# Altium PCB MB1710051255.PcbDoc (part 2 of 4)
Units mm, origin at the board's own origin, x right, y up, seen from the top; angles counter-clockwise.
Board outline 209.55 x 153.67 mm, 2 copper layers (Top Layer, Bottom Layer); 288 components, 212 nets, 1030 pads, 414 vias.
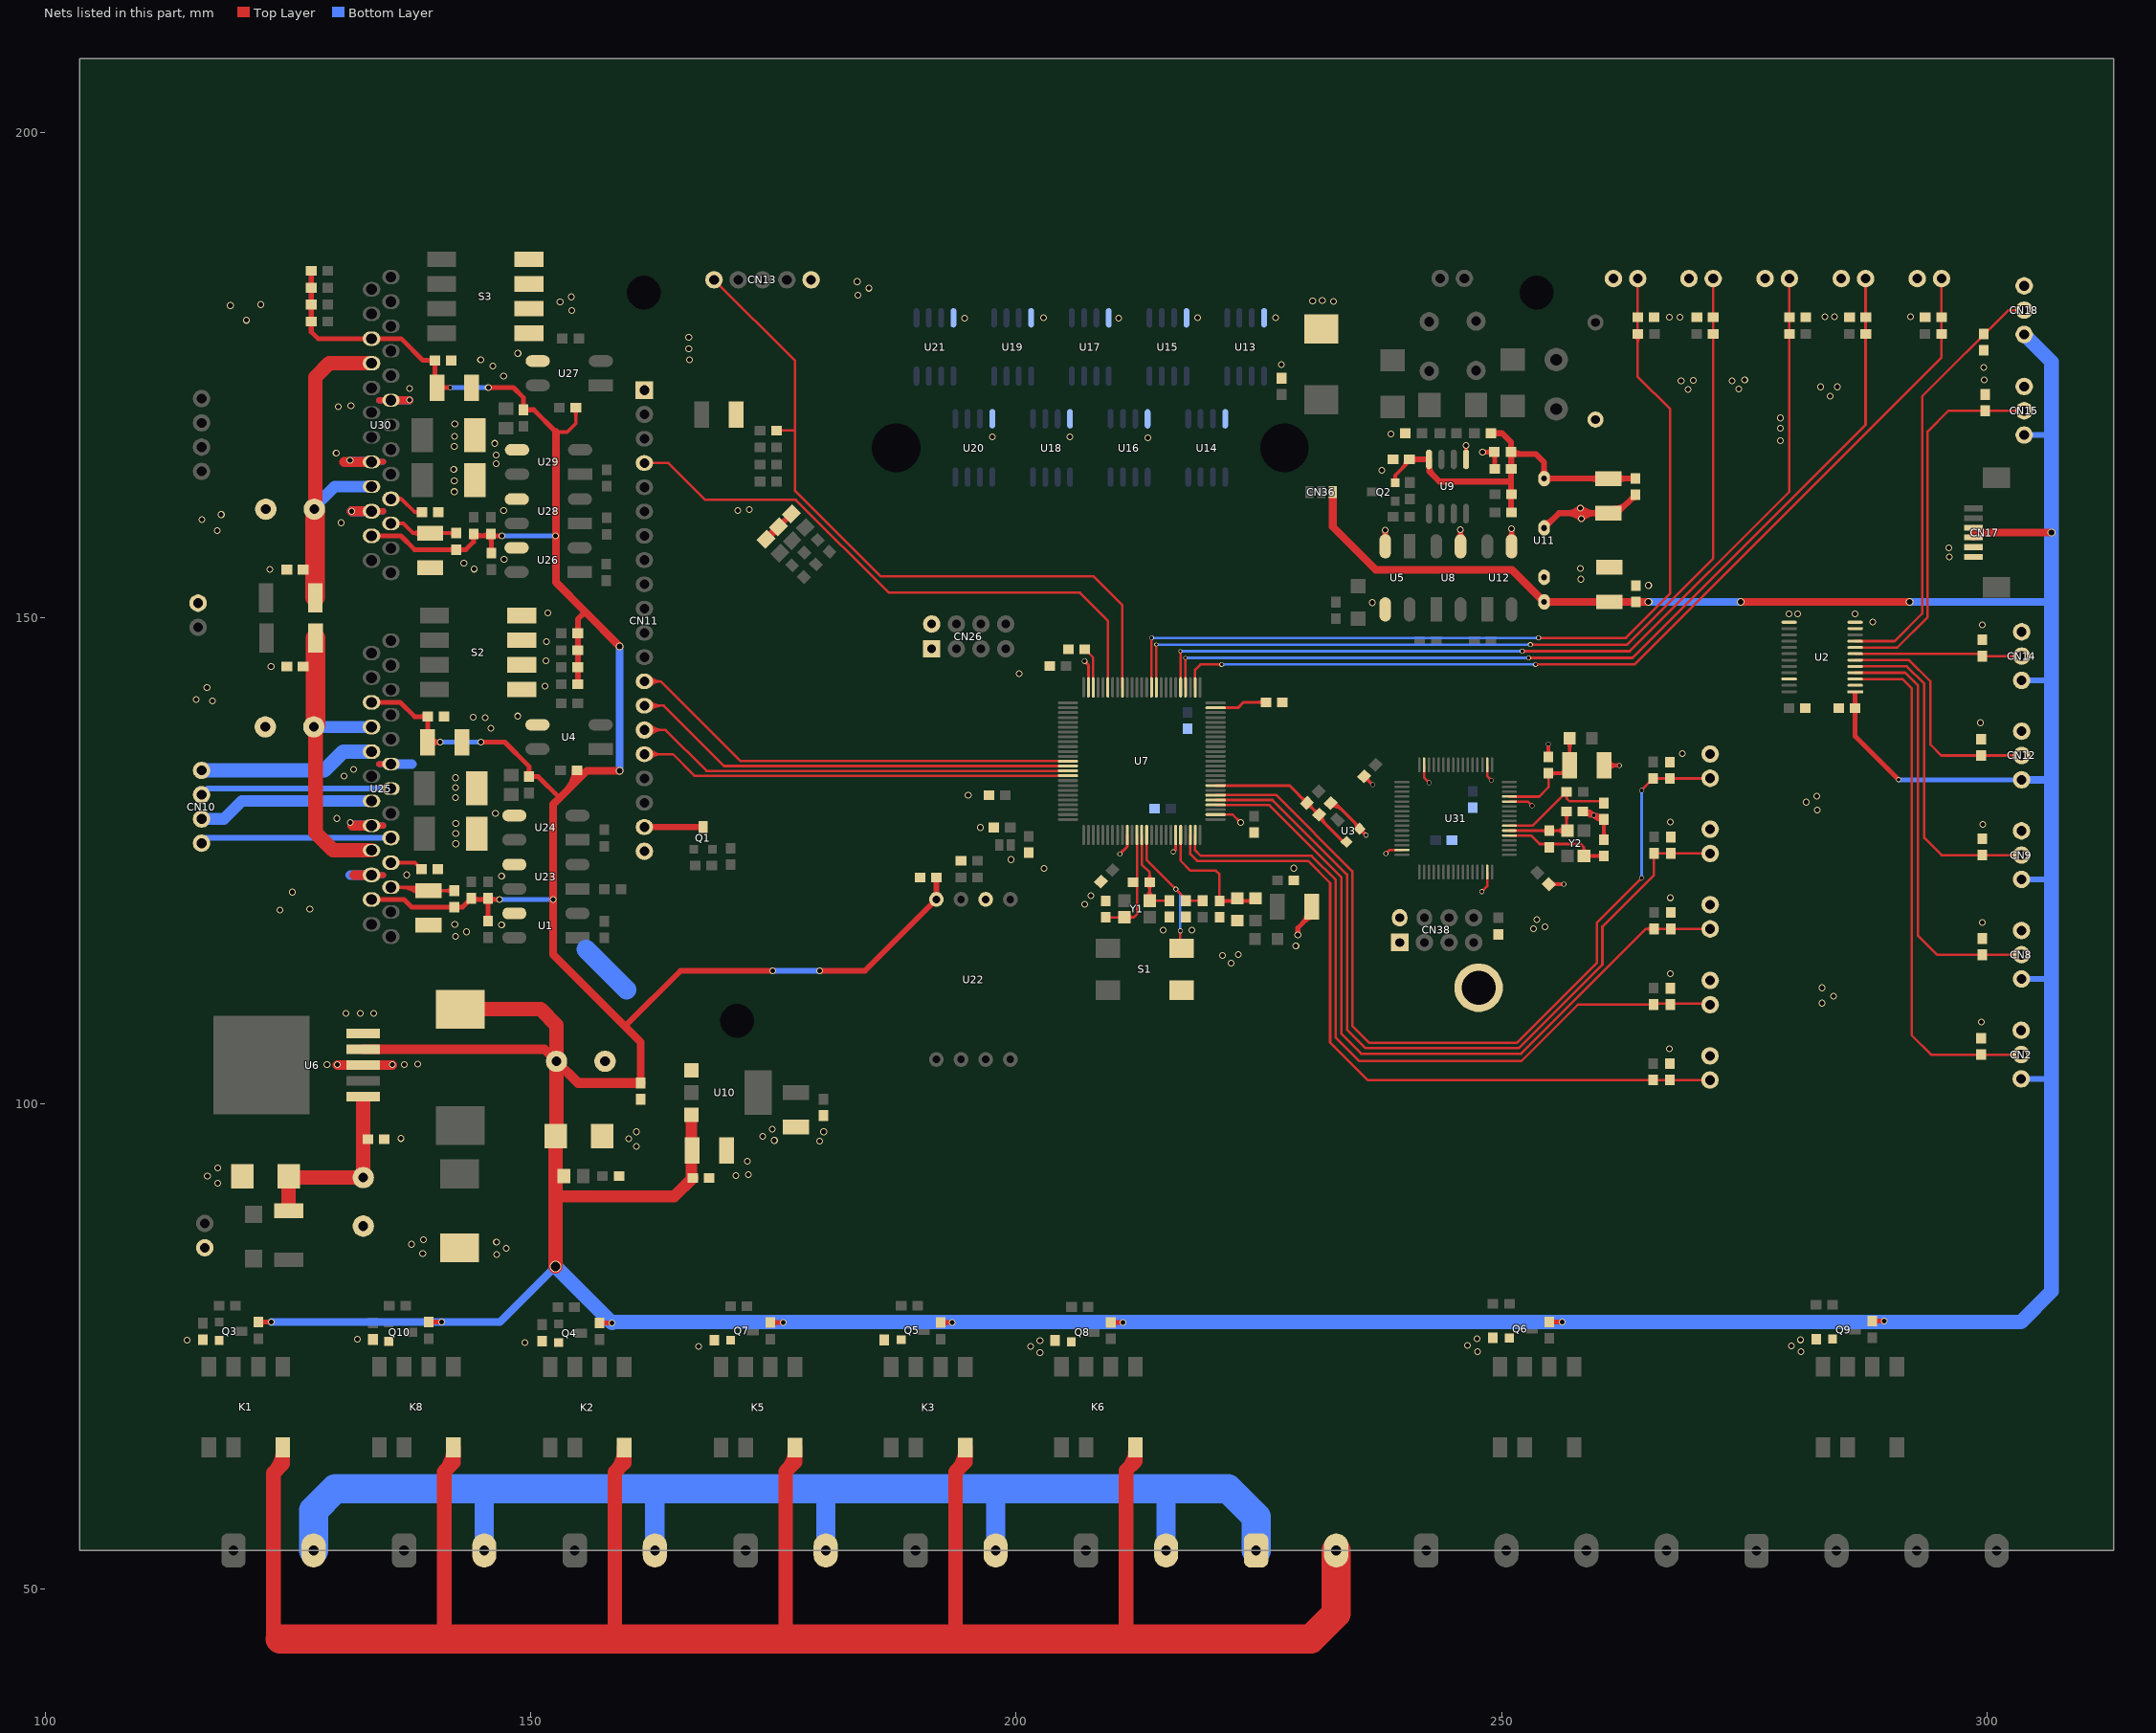
[diagram p2: the nets of this part, all layers, seen from the top]

## Via types
v1: diameter 0.7, hole 0.5, Top Layer to Bottom Layer, 231 vias
v2: diameter 0.5, hole 0.38, Top Layer to Bottom Layer, 67 vias
v3: diameter 0.5, hole 0.35, Top Layer to Bottom Layer, 64 vias
v4: diameter 0.42, hole 0.3, Top Layer to Bottom Layer, 27 vias
v5: diameter 0.45, hole 0.32, Top Layer to Bottom Layer, 8 vias
v6: diameter 0.8, hole 0.6, Top Layer to Bottom Layer, 8 vias
v7: diameter 1, hole 0.8, Top Layer to Bottom Layer, 4 vias
v8: diameter 0.45, hole 0.35, Top Layer to Bottom Layer, 3 vias
v9: diameter 1.2, hole 1, Top Layer to Bottom Layer, 1 vias
v10: diameter 0.6, hole 0.45, Top Layer to Bottom Layer, 1 vias

## Nets (pads, with @x,y where several pads share a name; then routed paths per layer and width w, separated by ;. In a path a pad name is that pad's centre, name@x,y a point inside that pad or via, vN(x,y) a via of type N, cw(c..) or ccw(c..) an arc to the next point about the centre after c; other vN are vias at no path point) (continued)
+5V: C9.1 C11.1 C14.2 C23.1 C36.2 C37.1 C39.1 C41.1 C42.1 C46.2 C64.1 C71.1 CN2.3 CN8.3 CN9.3 CN12.3 CN14.3 CN15.3 CN17.3 CN17.4 CN18.3 CN36.3 D5.2 DS4.1 L1.2 R7.1 R8.2 R10.2 R11.2 R13.1 R24.2 R28.1 R34.1 R35.1 R36.1 R38.1 R53.1 R54.1 R55.1 R56.1 R66.1 R67.1 R68.1 R69.1 R83.2 R85.2 R86.2 R88.1 R90.2 R93.1 R94.1 R95.1 R96.1 U2.1 U6.4 U10.3 U11.1 U22.1 U25.4 U25.20 U30.4 U30.20 | length 800.9
  Top Layer w0.38: 152.578,169.164 153.746,169.164 154.633,170.051 R85.2@154.633,171.679 ; R85.2@154.414,171.459 cw(c153.885,170.93) 154.633,170.93 cw(c155.382,170.93) R85.2@154.853,171.459
  Top Layer w0.5: R53.1@121.92,77.473 v1(123.266,77.473) ; R53.1@122.097,77.296 cw(c122.524,76.87) 122.524,77.473 cw(c122.524,78.077) R53.1@122.097,77.65 ; R93.1@127.204,180.366 cw(c126.777,179.94) 127.381,179.94 cw(c127.985,179.94) R93.1@127.558,180.366 ; R93.1@127.204,180.72 ccw(c126.777,181.147) 127.381,181.147 ccw(c127.985,181.147) R93.1@127.558,180.72 ; R94.1@127.204,182.119 cw(c126.777,181.692) 127.381,181.692 cw(c127.985,181.692) R94.1@127.558,182.119 ; R94.1@127.204,182.473 ccw(c126.777,182.899) 127.381,182.899 ccw(c127.985,182.899) R94.1@127.558,182.473 ; R95.1@127.204,183.846 cw(c126.777,183.419) 127.381,183.419 cw(c127.985,183.419) R95.1@127.558,183.846 ; R95.1@127.204,184.2 ccw(c126.777,184.627) 127.381,184.627 ccw(c127.985,184.627) R95.1@127.558,184.2 ; R96.1@127.204,185.573 cw(c126.777,185.147) 127.381,185.147 cw(c127.985,185.147) R96.1@127.558,185.573 ; R96.1@127.381,185.75 R95.1@127.381,184.023 R94.1@127.381,182.296 R93.1@127.381,180.543 127.381,179.476 128.075,178.782 U30.20@133.592,178.782 136.635,178.782 138.887,176.53 C9.1@140.132,176.53 140.132,173.939 C11.1@140.335,173.736 v2(141.707,173.736) ; U25.4@133.592,120.997 136.94,120.997 137.717,120.22 R11.2@142.113,120.22 142.951,120.22 R24.2@143.866,121.134 143.994,121.006 R13.1@145.593,121.006 ; U25.20@133.592,141.317 136.559,141.317 138.024,139.852 C71.1@139.37,139.852 C23.1@139.37,137.211 v1(140.665,137.211) ; U30.4@133.592,158.462 136.61,158.462 138.022,157.05 R86.2@142.316,157.05 143.309,157.05 144.094,157.836 R90.2@144.094,158.676 ; C71.1@139.143,139.676 ccw(c138.716,139.249) 138.716,139.852 ccw(c138.716,140.456) C71.1@139.143,140.029 ; C71.1@139.193,139.676 cw(c138.766,139.249) 139.37,139.249 cw(c139.973,139.249) C71.1@139.547,139.676 ; R69.1@139.471,77.473 v1(140.792,77.473) ; R69.1@139.648,77.296 cw(c140.075,76.87) 140.075,77.473 cw(c140.075,78.077) R69.1@139.648,77.65 ; C23.1@139.732,136.849 cw(c140.606,135.975) 140.606,137.211 cw(c140.606,138.447) C23.1@139.732,137.573 ; C9.1@139.905,176.353 ccw(c139.478,175.926) 139.478,176.53 ccw(c139.478,177.134) C9.1@139.905,176.707 ; C9.1@139.955,176.353 cw(c139.528,175.926) 140.132,175.926 cw(c140.735,175.926) C9.1@140.309,176.353 ; R11.2@141.936,120.043 ccw(c141.509,119.616) 141.509,120.22 ccw(c141.509,120.824) R11.2@141.936,120.397 ; R86.2@142.139,156.873 ccw(c141.713,156.446) 141.713,157.05 ccw(c141.713,157.654) R86.2@142.139,157.227 ; R11.2@142.29,120.043 cw(c142.717,119.616) 142.717,120.22 cw(c142.717,120.824) R11.2@142.29,120.397 ; R86.2@142.493,156.873 cw(c142.92,156.446) 142.92,157.05 cw(c142.92,157.654) R86.2@142.493,157.227 ; R90.2@143.917,158.449 cw(c143.491,158.022) 144.094,158.022 cw(c144.698,158.022) R90.2@144.271,158.449 ; R24.2@144.042,121.261 ccw(c144.659,121.878) 144.659,121.006 ; R90.2@144.094,158.752 144.401,158.445 R88.1@145.872,158.445 ; R90.2@144.271,158.802 ccw(c145.133,159.665) 145.133,158.445 ; 144.803,121.006 ccw(c144.803,121.872) R13.1@145.416,121.259 ; 144.837,158.445 ccw(c144.837,159.659) R88.1@145.695,158.801 ; v1(144.856,137.211) 147.32,137.211 149.809,134.722 R8.2@149.809,133.678 150.751,133.678 152.959,131.47 ; R7.1@145.416,119.023 ccw(c144.989,119.449) 145.593,119.449 ccw(c146.196,119.449) R7.1@145.77,119.023 ; R13.1@145.416,120.906 cw(c144.989,120.479) 145.593,120.479 cw(c146.196,120.479) R13.1@145.77,120.906 ; R7.1@145.593,118.796 R13.1@145.593,121.006 ; R13.1@145.593,121.133 R13.1@145.593,121.006 ; v1(145.618,173.736) 148.209,173.736 149.225,172.72 R83.2@149.225,171.448 150.294,171.448 152.578,169.164 ; R88.1@145.695,158.447 cw(c145.146,157.898) 145.923,157.898 ; R38.1@145.746,156.919 ccw(c145.319,157.346) 145.923,157.346 ccw(c146.527,157.346) R38.1@146.1,156.919 ; R13.1@145.77,121.259 ccw(c146.382,121.872) 146.382,121.006 ; R38.1@145.923,156.693 145.923,158.394 R88.1@145.872,158.445 ; v1(146.787,121.006) R13.1@145.593,121.006 ; v1(147.015,158.445) R88.1@145.872,158.445 ; R83.2@149.048,171.675 ccw(c148.621,172.102) 149.225,172.102 ccw(c149.829,172.102) R83.2@149.402,171.675 ; R83.2@149.402,171.271 cw(c149.829,170.845) 149.829,171.448 cw(c149.829,172.052) R83.2@149.402,171.625 ; R8.2@149.632,133.905 ccw(c149.206,134.332) 149.809,134.332 ccw(c150.413,134.332) R8.2@149.986,133.905 ; R8.2@149.986,133.502 cw(c150.413,133.075) 150.413,133.678 cw(c150.413,134.282) R8.2@149.986,133.855 ; R54.1@157.074,77.397 v1(158.369,77.397) ; R54.1@157.25,77.22 cw(c157.677,76.793) 157.677,77.397 cw(c157.677,78.001) R54.1@157.25,77.574 ; R66.1@174.676,77.422 v1(175.997,77.422) ; R66.1@174.853,77.246 cw(c175.279,76.819) 175.279,77.422 cw(c175.279,78.026) R66.1@174.853,77.599 ; R55.1@192.202,77.422 v1(193.396,77.422) ; R55.1@192.379,77.246 cw(c192.805,76.819) 192.805,77.422 cw(c192.805,78.026) R55.1@192.379,77.599 ; R67.1@209.728,77.448 v1(210.998,77.448) ; R67.1@209.905,77.271 cw(c210.331,76.844) 210.331,77.448 cw(c210.331,78.051) R67.1@209.905,77.625 ; R56.1@254.914,77.499 v1(256.235,77.499) ; R56.1@255.091,77.322 cw(c255.518,76.895) 255.518,77.499 cw(c255.518,78.102) R56.1@255.091,77.675 ; C14.2@286.234,140.539 cw(c285.807,140.112) 286.41,140.112 cw(c287.014,140.112) C14.2@286.587,140.539 ; C14.2@286.234,140.893 ccw(c285.807,141.32) 286.41,141.32 ccw(c287.014,141.32) C14.2@286.587,140.893 ; U2.1@286.41,142.316 C14.2@286.41,140.716 286.41,137.82 v3(290.881,133.35) ; R68.1@288.163,77.575 v1(289.408,77.575) ; R68.1@288.34,77.398 cw(c288.767,76.971) 288.767,77.575 cw(c288.767,78.178) R68.1@288.34,77.752
  Top Layer w0.6: R28.1@154.838,143.18 R34.1@154.838,144.932 R35.1@154.838,146.685 R36.1@154.838,148.438 154.838,149.885 155.6,150.647 ; 159.69,107.95 165.405,113.665 v1(174.93,113.665) ; v1(179.73,113.665) 184.419,113.665 U22.1@191.77,121.016 C64.1@191.77,123.266 ; U11.1@254.374,151.66 U11.1@254.378,151.663
  Top Layer w0.8: 152.578,169.164 152.578,153.67 155.6,150.647 v6(159.156,147.091) ; 153.767,132.278 ccw(c151.73,134.315) R10.2@154.61,134.315 ; R10.2@154.76,134.315 154.915,134.315 155.359,133.871 ; v6(159.144,134.277) 155.766,134.277 155.359,133.871 ; C36.2@161.315,102.108 161.315,106.324 159.69,107.95 152.298,115.341 v1(152.298,121.006) 152.298,130.81 152.959,131.47 155.359,133.871 ; CN36.3@232.6,162.966 232.6,159.398 237.033,154.965 251.069,154.965 U11.1@254.374,151.66 ; U11.1@254.378,151.663 C41.1@261.087,151.663 C42.1@263.83,151.663 v6(265.125,151.663) ; C41.1@260.243,151.407 ccw(c259.625,150.789) 259.625,151.663 ccw(c259.625,152.537) C41.1@260.243,151.919 ; C41.1@261.931,151.407 cw(c262.549,150.789) 262.549,151.663 cw(c262.549,152.537) C41.1@261.931,151.919 ; v6(274.599,151.663) v6(291.998,151.663) ; CN17.3@298.596,158.394 298.596,158.801 ; CN17.4@298.596,159.207 298.596,158.801 ; v6(306.629,158.801) 298.596,158.801
  Top Layer w1: U6.4@132.715,105.579 151.407,105.579 C37.1@152.643,104.343 154.878,102.108 C36.2@161.315,102.108
  Top Layer w1.2: 152.552,90.424 164.77,90.424 C46.2@166.675,92.329 166.573,92.329 166.548,92.354 U10.3@166.548,98.831
  Top Layer w1.5: L1.2@142.723,109.708 150.997,109.708 152.643,108.062 C37.1@152.643,104.343 152.643,96.712 D5.2@152.552,96.622 152.552,90.424 v9(152.552,83.214) ; D5.2@152.27,97.004 ccw(c151.368,97.906) 152.643,97.906
  Bottom Layer w0.5: v1(140.665,137.211) v1(144.856,137.211) ; v2(141.707,173.736) v1(145.618,173.736) ; v1(146.787,121.006) v1(152.298,121.006) ; v1(147.015,158.445) v1(152.552,158.445) ; v3(290.881,133.35) 290.888,133.343 CN12.3@303.563,133.343
  Bottom Layer w0.6: v1(174.93,113.665) v1(179.73,113.665) ; CN2.3@303.513,102.533 305.899,102.533 ; CN8.3@303.538,112.82 306.596,112.82 306.629,112.852 ; CN9.3@303.538,123.081 306.622,123.081 306.629,123.088 ; CN14.3@303.563,143.579 306.596,143.579 306.629,143.612 ; CN15.3@303.817,168.852 306.61,168.852 306.629,168.834 ; 306.603,151.663 306.629,151.689 ; 306.622,133.343 306.629,133.35
  Bottom Layer w0.8: v1(123.266,77.473) v1(140.792,77.473) 146.812,77.473 v9(152.552,83.214) ; v6(159.144,134.277) v6@159.144,147.079 ; v6(265.125,151.663) v6(274.599,151.663) ; v6(291.998,151.663) 306.603,151.663 ; CN12.3@303.563,133.343 306.622,133.343
  Bottom Layer w1.5: v9(152.552,83.214) v1(158.369,77.397) ; v1@158.369,77.499 v1(256.235,77.499) 303.479,77.499 306.629,80.648 306.629,112.852 306.629,123.088 306.629,133.35 306.629,143.612 306.629,151.689 306.629,168.834 306.629,176.404 CN18.3@303.817,179.215
+5VISO: C38.1 C43.1 C44.1 Q2.2 R43.1 R48.1 R49.1 R50.1 R52.2 U9.8 U11.6 | length 52.3
  Top Layer w0.38: Q2.2@238.85,164.133 ccw(c238.394,164.589) 239.039,164.589 ccw(c239.684,164.589) Q2.2@239.228,164.133 ; Q2.2@239.039,163.944 239.039,164.694 240.487,166.141 C38.1@240.487,166.345 ; 239.729,165.383 ccw(c238.768,166.345) C38.1@240.127,166.345
  Top Layer w0.6: C38.1@240.487,166.345 U9.8@242.519,166.345 242.519,165.125 243.586,164.059 250.977,164.059 ; U9.8@242.537,165.646 ccw(c243.836,165.646) 242.917,164.727 ; R52.2@248.893,169.037 250.038,169.037 250.964,168.111 R50.1@250.964,166.903 ; R48.1@250.811,161.025 ccw(c250.411,161.426) 250.977,161.426 ; R43.1@250.811,162.596 cw(c250.411,162.196) 250.977,162.196 ; R43.1@250.811,162.879 ccw(c250.411,163.28) 250.977,163.28 ; R50.1@250.811,167.248 ccw(c250.441,167.618) 250.964,167.618 ; R49.1@250.836,165.495 ccw(c250.466,165.865) 250.989,165.865 ; R49.1@250.977,165.354 250.977,164.059 ; R49.1@250.989,165.1 250.989,166.878 R50.1@250.964,166.903 ; 250.989,166.593 cw(c251.516,166.593) R50.1@251.143,166.965 ; R48.1@251.003,160.884 250.977,160.909 250.977,164.059 ; R50.1@251.143,167.248 ccw(c251.975,168.08) 251.975,166.903 ; U11.6@254.162,164.772 ccw(c253.65,165.284) 254.374,165.284 ccw(c255.099,165.284) U11.6@254.587,164.772 ; U11.6@254.587,164.148 cw(c255.107,163.627) 255.107,164.363 ; U11.6@254.587,164.572 ccw(c255.09,165.075) 255.09,164.363 ; C43.1@260.07,164.037 ccw(c259.282,163.248) 259.282,164.363 ccw(c259.282,165.479) C43.1@260.07,164.69 ; C43.1@261.9,164.037 cw(c262.688,163.248) 262.688,164.363 cw(c262.688,165.479) C43.1@261.9,164.69 ; C44.1@263.779,164.363 C43.1@260.985,164.363 254.378,164.363 U11.6@254.374,164.36 254.374,166.046 253.517,166.903 R50.1@250.964,166.903
GND: C1.2 C2.2 C3.1 C4.2 C5.2 C6.2 C7.2 C8.2 C9.2 C10.2 C11.2 C12.1 C13.2 C14.1 C15.1 C16.1 C17.1 C18.1 C19.2 C20.2 C21.2 C22.2 C23.2 C24.1 C25.1 C26.2 C27.1 C28.2 C29.1 C30.1 C31.1 C32.1 C33.1 C34.1 C35.2 C36.1 C37.2 C39.2 C40.1 C41.2 C42.2 C45.2 C46.1 C47.2 C48.2 C49.2 C50.1 C51.1 C52.1 C53.1 C54.1 C55.1 C56.2 C57.1 C58.2 C59.2 C60.1 C61.1 C62.2 C63.2 C64.2 C65.2 C66.1 C67.1 C68.2 C69.2 C70.2 C71.2 C72.2 C73.2 CN1.1 CN2.1 CN3.1 CN4.1 CN5.1 CN6.1 CN7.1 CN8.1 CN9.1 CN11.1 CN11.20 CN12.1 CN13.5 CN14.1 CN15.1 CN17.1 CN17.2 CN18.1 CN19.1 CN20.1 CN21.1 CN22.1 CN23.1 CN24.1 CN26.1 CN26.5 CN38.1 CN38.5 D3.1 D4.1 D5.1 DS1.2 DS2.2 DS3.2 pad.0@247.621,111.923 Q3.2 Q4.2 Q5.2 Q6.2 Q7.2 Q8.2 Q9.2 Q10.2 R26.1 R27.1 R44.1 R45.1 R61.2 R62.2 R63.2 R64.2 R74.2 R75.2 R76.2 R78.2 R80.1 R82.1 R91.1 R92.1 R97.1 S1.1 S2.1 S2.2 S2.3 S2.4 S3.1 S3.2 S3.3 S3.4 U1.3 U2.2 U2.11 U2.12 U2.13 U2.22 U3.2 U4.3 U5.3 U6.3 U6.5 U7.10 U7.20 U7.27 U7.74 U10.1 U11.2 U13.4 U14.4 U15.4 U16.4 U17.4 U18.4 U19.4 U20.4 U21.4 U22.3 U23.3 U24.3 U25.6 U25.10 U25.15 U26.3 U27.3 U28.3 U29.3 U30.6 U30.10 U30.15 U31.12 U31.18 U31.31 U31.47 U31.63 | length 128.8
  Top Layer w0.254: U7.27@220.528,129.755 222.289,129.755 v1(223.114,128.93) ; v1@222.891,128.93 ccw(c222.352,128.93) 222.733,129.311 ccw(c223.114,129.692) v1@223.114,129.153 ; v2(238.074,125.755) 238.424,126.105 U31.47@239.731,126.105 ; v2@238.074,125.878 ccw(c238.074,126.175) 238.284,125.965 ccw(c238.494,125.755) v2@238.197,125.755 ; U31.31@242.006,134.88 242.006,133.559 v2(242.545,133.02) ; v2@242.422,133.02 ccw(c242.125,133.02) 242.335,133.23 ccw(c242.545,133.44) v2@242.545,133.143 ; v2(247.955,121.818) 248.506,122.369 U31.63@248.506,123.83 ; v2@247.955,121.941 ccw(c247.955,122.238) 248.165,122.028 ccw(c248.375,121.818) v2@248.078,121.818 ; U31.18@248.506,134.88 248.506,133.714 v2(248.945,133.274) ; v2@248.822,133.274 ccw(c248.525,133.274) 248.735,133.484 ccw(c248.945,133.694) v2@248.945,133.397 ; U31.12@250.781,131.105 252.689,131.105 v2(253.136,130.658) ; v2@253.013,130.658 ccw(c252.716,130.658) 252.926,130.868 ccw(c253.136,131.078) v2@253.136,130.781
  Top Layer w0.3: v10@207.01,145.593 207.428,145.175 U7.74@207.428,142.855 ; v10@207.035,145.417 cw(c207.035,145.055) 207.291,145.311 cw(c207.548,145.567) v10@207.185,145.567 ; v2(210.668,125.705) 211.428,126.465 U7.10@211.428,127.655 ; v2(216.179,125.908) 216.428,126.157 U7.20@216.428,127.655 ; C21.2@232.381,130.944 232.847,130.944 235.365,128.426 U3.2@235.365,128.289 v2(236.017,127.638) ; C21.2@232.417,130.63 cw(c232.417,128.831) 233.688,130.103 ; C21.2@232.417,130.93 cw(c232.417,129.856) 233.176,130.615 ; 234.744,129.047 cw(c233.986,128.289) U3.2@235.058,128.289 ; 235.074,128.717 ccw(c235.365,129.008) U3.2@235.365,128.597 ; U3.2@235.365,127.982 cw(c235.365,127.241) 235.889,127.765 cw(c236.414,128.289) U3.2@235.672,128.289 ; 235.734,127.855 cw(c235.533,127.508) v2@235.92,127.612 ; 235.799,127.921 ccw(c236.146,128.121) v2@236.043,127.734 ; C66.1@235.831,133.347 cw(c235.831,132.502) 236.428,133.1 cw(c237.025,133.697) C66.1@236.181,133.697 ; C66.1@235.831,133.697 v2(236.703,132.825)
  Top Layer w0.38: C68.2@254.594,135.956 ccw(c254.064,136.485) 254.813,136.485 ccw(c255.561,136.485) C68.2@255.032,135.956 ; C68.2@254.813,135.687 v2(254.813,137.008) ; C16.1@254.847,122.597 v2(256.405,122.597) ; C16.1@255.101,122.343 cw(c255.716,121.728) 255.716,122.597 ; C16.1@255.101,122.781 ccw(c255.545,123.225) C16.1@255.545,122.597 ; C65.2@258.369,130.073 259.08,130.073 ; C65.2@258.411,130.143 cw(c258.536,129.022) v2@259.334,129.819 ; C65.2@258.453,129.765 cw(c258.648,128.016) 259.893,129.261 ; C65.2@258.657,129.875 cw(c259.08,129.523) 259.08,130.073 ; C65.2@258.657,130.272 ccw(c259.08,130.623) 259.08,130.073 ; 259.086,129.642 ccw(c259.179,130.122) v2@259.453,129.717 ; 259.247,129.952 cw(c258.983,129.588) v2@259.427,129.658 ; 259.272,129.855 cw(c259.105,129.565) v2@259.428,129.651 ; v2@259.522,129.618 cw(c259.822,129.203) 259.904,129.709 ; v2@259.544,129.683 ccw(c259.832,129.76) 259.683,129.502 ; v2@259.546,129.676 ccw(c259.97,129.738) 259.714,129.394 ; v2@259.609,129.545 ccw(c260.372,130.308) C22.2@260.539,129.241 ; C22.2@260.283,129.07 ccw(c259.893,128.765) 259.893,129.261 ; C22.2@260.283,129.451 cw(c259.893,129.756) 259.893,129.261 ; C20.2@260.309,127.447 ccw(c259.779,127.976) 260.528,127.976 ccw(c261.276,127.976) C20.2@260.747,127.447 ; C22.2@260.309,128.991 cw(c259.779,128.462) 260.528,128.462 cw(c261.276,128.462) C22.2@260.747,128.991 ; C22.2@260.48,129.617 cw(c260.229,131.222) 259.08,130.073 ; C20.2@260.528,127.178 C22.2@260.528,129.261 259.893,129.261 ; C26.2@260.553,134.823 v2(262.128,134.823) ; C26.2@260.958,134.419 cw(c261.934,133.442) 261.934,134.823 cw(c261.934,136.204) C26.2@260.958,135.228 ; 261.858,134.803 cw(c261.94,134.497) v2@262.098,134.771 ; 261.858,134.844 ccw(c261.94,135.149) v2@262.098,134.875 ; 259.08,130.073 259.893,129.261
  Top Layer w0.5: DS3.2@174.224,158.118 DS2.2@175.499,159.393 DS1.2@176.846,160.74 ; DS3.2@174.295,158.588 ccw(c174.295,159.554) 174.978,158.871 ccw(c175.661,158.188) DS3.2@174.695,158.188 ; DS3.2@174.462,158.574 ccw(c173.872,159.596) DS2.2@175.035,159.391 ; DS3.2@174.68,158.356 cw(c175.702,157.765) DS2.2@175.498,158.928 ; DS2.2@175.029,159.322 cw(c174.063,159.322) 174.746,158.639 cw(c175.429,157.956) DS2.2@175.429,158.922 ; DS2.2@175.57,159.863 ccw(c175.57,160.829) 176.253,160.146 ccw(c176.936,159.463) DS2.2@175.97,159.463 ; DS1.2@176.376,160.669 cw(c175.41,160.669) 176.093,159.986 cw(c176.776,159.303) DS1.2@176.776,160.269 ; v1(229.006,117.373) 229.006,118.085 230.454,119.532 C62.2@230.454,120.269 ; 229.475,118.553 ccw(c228.347,119.681) C62.2@229.942,119.681 ; 229.834,118.912 cw(c230.454,118.292) C62.2@230.454,119.169
  Top Layer w0.6: U25.6@133.592,123.537 134.803,123.537 134.815,123.525 ; U25.10@133.592,128.617 134.803,128.617 ; U30.6@133.592,161.002 134.803,161.002 ; U30.10@133.592,166.082 134.803,166.082 ; 134.36,134.946 134.381,134.967 U25.15@135.592,134.967 ; 134.36,172.411 134.381,172.432 U30.15@135.592,172.432
  Top Layer w0.8: U30.15@135.601,172.441 U30.15@135.592,172.432 137.507,172.432 v1(137.516,172.441)
  Top Layer w1: v1@130.082,103.954 U6.3@132.715,103.954 v1@135.704,103.954 ; 130.742,166.082 U30.10@133.592,166.082 ; v1(131.555,161.002) U30.6@133.592,161.002 ; 131.581,128.617 U25.10@133.592,128.617 ; 131.817,123.537 U25.6@133.592,123.537
  Bottom Layer w0.6: U25.6@133.592,123.537 134.803,123.537 134.815,123.525 ; U25.10@133.592,128.617 134.803,128.617 ; U30.6@133.592,161.002 134.803,161.002 134.815,160.99 ; U30.10@133.592,166.082 134.803,166.082 ; 134.36,172.411 134.381,172.432 U30.15@135.592,172.432 ; 134.381,134.967 U25.15@135.592,134.967
  Bottom Layer w0.8: U30.15@135.592,172.432 v1@137.507,172.432
  Bottom Layer w1: 131.403,123.537 U25.6@133.592,123.537 ; v1@131.403,166.082 U30.10@133.592,166.082 ; v1@131.538,161.002 U30.6@133.592,161.002 ; 131.69,128.617 U25.10@133.592,128.617 ; U25.15@135.592,134.967 137.727,134.967
  Bottom Layer w2: 155.702,115.875 159.868,111.709
  other v1: 202.438,74.324 280.822,74.425 247.523,74.451 167.284,74.959 201.498,74.984 279.857,75.035 246.482,75.06 149.403,75.365 202.438,75.568 114.579,75.619 280.797,75.644 132.131,75.695 247.447,75.771 146.482,84.455 138.862,84.531 147.447,85.065 137.693,85.496 146.456,85.725 138.938,85.954 117.754,91.796 116.688,92.532 171.12,92.558 172.415,92.685 117.729,93.37 172.314,94.056 160.884,95.58 179.73,96.114 175.082,96.19 160.096,96.368 136.627,96.393 173.888,96.622 160.858,97.079 180.162,97.079 174.854,97.358 130.048,103.988 135.738,103.988 129.007,104.013 136.982,104.013 138.354,104.038 267.284,105.639 299.39,108.382 130.962,109.271 132.436,109.296 133.807,109.296 283.007,110.338 284.175,111.049 283.007,111.912 267.36,113.386 222.123,114.452 221.259,115.24 222.885,115.341 228.803,116.23 142.24,117.196 143.383,117.678 215.113,117.856 218.084,117.856 253.289,118.008 254.457,118.212 146.99,118.389 142.164,118.44 299.491,118.643 253.619,118.923 124.155,119.939 127.229,120.015 207.035,120.498 267.386,121.183 207.696,121.387 125.425,121.768 146.99,123.419 137.211,123.546 202.87,124.206 228.6,124.231 199.466,125.12 142.265,126.746 142.265,127.813 196.291,128.422 299.542,128.753 142.265,128.829 131.394,128.93 267.36,129.007 129.997,129.362 146.355,129.896 282.499,130.226 281.381,131.039 142.24,131.496 282.448,131.648 195.047,131.75 142.24,132.537 142.24,133.553 130.759,133.706 131.724,134.417 268.605,136.042 145.872,138.659 299.314,139.217 145.313,139.725 144.043,139.802 148.641,139.903 117.221,141.453 115.519,141.605 116.637,142.824 151.46,142.977 200.304,144.272 123.241,145.009 151.536,145.593 151.613,147.574 299.491,149.301 288.214,149.606 279.603,150.419 280.467,150.444 286.41,150.444 151.74,150.546 236.652,151.587 265.125,153.365 258.166,154 123.114,155.016 144.145,155.042 258.115,155.092 143.104,155.651 147.244,156.032 296.088,156.286 296.062,157.226 117.678,159.004 130.454,159.817 116.129,160.122 118.11,160.655 147.193,161.087 171.323,161.087 172.491,161.188 142.113,163.017 142.113,164.135 142.062,165.303 146.431,165.913 131.369,166.243 146.431,166.802 129.946,167.005 142.113,167.665 146.279,167.996 278.714,168.275 213.538,168.554 197.536,168.656 205.537,168.656 142.138,168.707 278.689,169.545 142.164,169.977 278.714,170.612 130.15,171.78 131.47,171.882 283.82,172.847 269.215,173.558 274.422,173.584 137.516,173.66 282.854,173.812 284.556,173.812 268.478,174.447 273.736,174.447 269.748,174.498 275.031,174.549 299.72,174.549 147.193,174.93 299.669,175.793 146.101,175.946 227.305,176.098 166.319,176.581 144.831,176.606 148.666,177.267 166.268,177.749 166.268,178.918 120.701,180.67 194.691,180.899 210.566,180.899 202.819,180.924 218.694,180.924 226.695,180.95 267.259,181 268.351,181 283.286,181.051 284.277,181.051 292.1,181.051 154.229,181.661 119.05,182.194 122.174,182.296 153.01,182.55 232.664,182.626 230.53,182.651 231.521,182.728 154.153,183.083 183.693,183.261 184.836,183.972 183.617,184.658
  other v2: 259.486,129.667
  other v10: 207.035,145.567
ISO: C38.2 C43.2 C44.2 L2.2 R42.1 R49.2 R50.2 U5.2 U8.3 U9.5 U11.4 U12.3 | length 44.4
  Top Layer w0.38: U5.2@237.718,158.331 ccw(c237.019,159.03) 238.008,159.03 ccw(c238.998,159.03) U5.2@238.298,158.331 ; v1@237.87,158.99 cw(c237.505,158.779) 237.912,158.67 ; v1@237.895,158.957 cw(c237.622,158.684) 238.008,158.684 cw(c238.395,158.684) v1@238.122,158.957 ; 237.925,158.718 cw(c238.264,158.627) v1@238.088,158.931 ; v1@237.928,158.931 cw(c237.753,158.627) 238.092,158.718 ; U5.2@238.008,157.391 v1(238.008,159.07) ; 238.105,158.67 cw(c238.512,158.779) v1@238.147,158.99 ; U8.3@245.47,158.329 ccw(c244.77,159.029) 245.76,159.029 ccw(c246.75,159.029) U8.3@246.05,158.329 ; v1@245.606,159.026 cw(c245.17,158.774) 245.657,158.644 ; v1@245.632,158.992 cw(c245.323,158.683) 245.76,158.683 ; v1@245.665,158.967 cw(c245.481,158.648) 245.836,158.744 ; v1(245.745,159.106) 245.76,159.091 U8.3@245.76,157.389 ; 245.76,158.756 cw(c246.095,158.756) v1@245.858,158.992 ; 245.843,158.719 cw(c246.234,158.823) v1@245.884,159.026 ; v1@246.216,167.679 cw(c245.943,167.406) 246.329,167.406 cw(c246.715,167.406) v1@246.442,167.679 ; U9.5@246.329,166.345 v1(246.329,167.792) ; U12.3@250.728,158.329 ccw(c250.028,159.029) 251.018,159.029 ccw(c252.008,159.029) U12.3@251.308,158.329 ; v1@250.89,159.127 cw(c250.448,158.872) 250.941,158.741 ; v1@250.915,159.094 cw(c250.667,158.846) 251.018,158.846 ; U12.3@251.018,157.389 251.018,159.197 v1(251.028,159.207) ; 251.018,158.796 cw(c251.44,158.796) v1@251.141,159.094 ; 251.109,158.689 cw(c251.667,158.838) v1@251.167,159.127
  Top Layer w0.5: v1(248.031,167.107) R50.2@249.252,167.107 249.277,167.081 R49.2@249.277,165.354 ; R50.2@249.025,166.93 ccw(c248.598,166.503) 248.598,167.107 ccw(c248.598,167.71) R50.2@249.025,167.283 ; R49.2@249.101,165.531 ccw(c248.674,165.958) 249.277,165.958 ccw(c249.881,165.958) R49.2@249.454,165.531 ; R50.2@249.125,166.93 cw(c248.758,166.562) 249.277,166.562 ; 249.277,166.444 cw(c249.965,166.444) R50.2@249.479,166.93
  Top Layer w0.6: U11.4@254.374,159.28 255.902,160.807 C43.2@260.985,160.807 261.899,160.807 C44.2@263.779,162.687 ; U11.4@254.374,159.78 ccw(c254.374,160.987) 255.228,160.133 ; 256.706,160.807 ccw(c256.706,162.749) v1@258.079,161.376 ; 256.721,160.807 cw(c256.721,158.779) v1@258.156,160.213 ; v1@258.15,161.376 ccw(c259.523,162.749) 259.523,160.807 ; v1@258.226,160.213 cw(c259.661,158.779) C43.2@259.661,160.807 ; C43.2@260.07,160.481 ccw(c259.282,159.692) 259.282,160.807 ccw(c259.282,161.923) C43.2@260.07,161.134 ; C43.2@261.573,161.269 ccw(c261.573,163.173) 262.919,161.827 ; C44.2@263.352,162.26 cw(c263.779,161.833) C44.2@263.779,162.437
  other v1: 258.191,160.249 258.115,161.341 237.642,165.227 238.608,168.961
L: CN31.2 K1.8 K2.8 K3.8 K5.8 K6.8 K8.8 | length 252
  Top Layer w1.5: 124.181,44.834 124.155,44.809 123.495,45.469 123.495,61.928 ; K1.8@124.46,64.311 cw(c121.164,64.259) 123.495,61.928 ; K1.8@124.46,64.586 124.46,62.894 123.495,61.928 ; 141.072,44.834 141.072,62.055 142.011,62.995 K8.8@142.011,64.586 ; 141.081,62.065 ccw(c138.835,64.311) K8.8@142.011,64.311 ; 158.648,44.834 158.648,62.005 159.614,62.97 K2.8@159.614,64.561 ; 158.683,62.039 ccw(c156.437,64.286) K2.8@159.614,64.286 ; 176.251,44.834 176.251,62.106 177.216,63.071 K5.8@177.216,64.561 ; 176.357,62.213 ccw(c174.284,64.286) K5.8@177.216,64.286 ; 193.751,44.834 193.751,62.055 194.742,63.046 K3.8@194.742,64.561 ; 193.865,62.169 ccw(c191.749,64.286) K3.8@194.742,64.286 ; 211.277,44.834 211.303,44.86 211.303,62.182 212.268,63.148 K6.8@212.268,64.586 ; 211.445,62.325 ccw(c209.459,64.311) K6.8@212.268,64.311
  Top Layer w3: 124.181,44.834 141.072,44.834 158.648,44.834 176.251,44.834 193.751,44.834 211.277,44.834 230.327,44.834 232.954,47.461 CN31.2@232.954,53.953
N: CN28.2 CN29.2 CN30.2 CN31.1 CN33.2 CN34.2 CN35.2 | length 138.7
  Bottom Layer w2: CN35.2@145.197,53.953 145.197,60.211 145.288,60.303 ; CN29.2@162.773,53.953 162.773,60.288 162.789,60.303 ; CN33.2@180.376,53.953 180.376,60.211 180.467,60.303 ; 197.79,60.303 197.876,60.216 CN30.2@197.876,53.953 ; 215.417,60.303 215.428,60.293 CN34.2@215.428,53.953
  Bottom Layer w3: CN28.2@127.62,53.953 127.62,58.078 129.845,60.303 145.288,60.303 162.789,60.303 180.467,60.303 197.79,60.303 215.417,60.303 221.818,60.303 224.704,57.417 CN31.1@224.704,53.953
NetC1_1: C1.1 C10.1 F2.1 U25.8 U25.18 | length 35.1
  Top Layer w0.5: C10.1@126.238,145.009 127.787,145.009 127.813,144.983 ; C10.1@126.77,144.832 cw(c127.196,144.405) 127.196,145.009 cw(c127.196,145.612) C10.1@126.77,145.185
  Top Layer w1.5: C1.1@127.813,138.953 127.813,127.889 129.625,126.077 U25.8@133.592,126.077
  Top Layer w2: C1.1@127.813,138.953 127.813,144.983 F2.1@127.813,147.955
  Bottom Layer w1.2: C1.1@127.646,138.786 127.654,138.777 U25.18@133.592,138.777
NetC2_1: C2.1 C72.1 F3.1 U30.8 U30.18 | length 36.2
  Top Layer w1.5: C2.1@127.787,161.214 127.787,174.803 129.227,176.242 U30.18@133.592,176.242
  Top Layer w2: F3.1@127.787,152.095 C2.1@127.787,161.214
  Bottom Layer w1.2: C2.1@127.468,161.214 129.796,163.542 U30.8@133.592,163.542
NetC3_2: C3.2 CN2.2 U2.3 | length 54.1
  Top Layer w0.254: U2.3@286.41,143.718 291.283,143.718 292.227,142.773 292.227,107.036 294.23,105.033 CN2.2@303.513,105.033
NetC4_1: C4.1 CN3.2 R1.1 U7.23 | length 76.5
  Top Layer w0.254: U7.23@217.928,127.655 217.928,125.683 218.618,124.993 230.048,124.993 232.334,122.707 232.334,106.274 236.195,102.413 R1.1@265.582,102.413 ; 263.861,102.407 CN3.2@271.45,102.407
NetC5_1: C5.1 CN4.2 R2.1 U7.24 | length 75.7
  Top Layer w0.254: U7.24@218.428,127.655 218.428,126.072 218.999,125.501 230.429,125.501 232.918,123.012 232.918,106.782 235.331,104.369 252.019,104.369 257.835,110.185 R2.1@265.633,110.185 ; R2.1@265.557,110.287 271.368,110.287 CN4.2@271.475,110.18
NetC6_1: C6.1 CN5.2 R3.1 U7.29 | length 77.6
  Top Layer w0.254: U7.29@220.528,130.755 226.039,130.755 233.502,123.292 233.502,107.163 235.534,105.131 251.997,105.131 264.85,117.983 ; R3.1@265.406,117.734 ccw(c264.85,117.237) 264.85,117.983 ; R3.1@265.406,118.232 cw(c264.85,118.729) 264.85,117.983 ; CN5.2@271.475,117.978 271.47,117.983 R3.1@265.684,117.983 264.85,117.983
NetC7_1: C7.1 CN6.2 R4.1 U7.30 | length 82.8
  Top Layer w0.254: U7.30@220.528,131.255 226.377,131.255 234.061,123.571 234.061,107.62 235.996,105.685 251.768,105.685 260.375,114.292 260.375,118.212 265.684,123.52 R4.1@265.684,125.75 ; R4.1@265.684,125.755 R4.1@265.684,125.75 ; CN6.2@271.475,125.75 R4.1@265.684,125.75
NetC8_1: C8.1 CN7.2 R5.1 U7.31 | length 91.7
  Top Layer w0.254: U7.31@220.528,131.755 226.791,131.755 234.62,123.927 234.62,107.975 236.357,106.239 251.538,106.239 259.821,114.522 259.821,118.623 v2(264.414,123.215) ; v2@264.291,123.215 cw(c263.994,123.215) 264.204,123.005 cw(c264.414,122.795) v2@264.414,123.092 ; v2(264.414,132.258) 264.414,132.283 R5.1@265.608,133.477 271.455,133.477 CN7.2@271.475,133.497 ; v2@264.414,132.381 ccw(c264.414,132.616) 264.581,132.45 ; v2@264.537,132.258 cw(c264.895,132.258) 264.642,132.511
  Bottom Layer w0.254: v2@264.327,123.302 ccw(c264.117,123.512) 264.414,123.512 ccw(c264.711,123.512) v2@264.501,123.302 ; v2@264.327,132.171 cw(c264.117,131.961) 264.414,131.961 cw(c264.711,131.961) v2@264.501,132.171 ; v2(264.414,123.215) v2(264.414,132.258)
NetC12_2: C12.2 CN8.2 U2.4 | length 44.3
  Top Layer w0.254: U2.4@286.41,144.368 291.572,144.368 292.862,143.078 292.862,117.297 294.839,115.32 CN8.2@303.538,115.32
NetC15_2: C15.2 CN9.2 U2.5 | length 34.5
  Top Layer w0.254: U2.5@286.41,145.018 291.735,145.018 293.522,143.231 293.522,127.356 295.297,125.581 CN9.2@303.538,125.581
NetC18_2: C18.2 CN12.2 U2.6 | length 25
  Top Layer w0.254: U2.6@286.41,145.668 291.974,145.668 294.157,143.485 294.157,136.957 295.271,135.843 CN12.2@303.563,135.843
NetC20_1: C20.1 R98.1 U31.5 Y2.1 | length 13.4
  Top Layer w0.254: U31.5@250.781,127.605 253.014,127.605 253.898,126.721 258.14,126.721 258.47,126.39 ; Y2.1@258.216,125.959 ccw(c257.976,126.39) 258.47,126.39 ; Y2.1@258.47,125.501 258.47,126.39 ; Y2.1@258.724,125.959 cw(c258.964,126.39) 258.47,126.39
  Top Layer w0.38: Y2.1@258.47,125.501 C20.1@260.528,125.501 ; C20.1@260.309,125.282 ccw(c259.779,124.753) 259.779,125.501 ccw(c259.779,126.25) C20.1@260.309,125.721
NetC21_1: C21.1 R22.2 U3.1 U7.33 | length 21.6
  Top Layer w0.254: R22.2@229.945,130.573 cw(c229.945,129.622) 230.618,130.295 ; R22.2@230.187,130.726 C21.1@231.175,129.738 ; R22.2@230.318,130.946 ccw(c231.168,130.946) 230.567,130.346 ; 230.504,130.409 cw(c229.818,129.723) C21.1@230.788,129.723 ; 230.573,130.34 ccw(c231.161,130.928) C21.1@231.161,130.096
  Top Layer w0.3: U7.33@220.528,132.755 228.137,132.755 R22.2@229.945,130.946 ; R22.2@229.595,130.946 ccw(c228.75,130.946) 229.348,131.544 ccw(c229.945,132.141) R22.2@229.945,131.296 ; C21.1@231.175,129.738 231.175,129.467 233.699,126.942 U3.1@234.018,126.942 ; C21.1@231.211,129.723 ccw(c231.917,129.723) 231.417,129.224 ; C21.1@231.511,129.723 ccw(c232.941,129.723) 231.93,128.712
NetC22_1: C22.1 R99.2 U31.7 | length 13
  Top Layer w0.254: U31.7@250.781,128.605 253.194,128.605 R99.2@256.694,132.105 256.694,131.418 ; R99.2@256.491,131.793 cw(c256.247,131.418) 256.694,131.418 ; R99.2@256.898,131.793 ccw(c257.141,131.418) 256.694,131.418 ; C22.1@260.528,130.937 260.35,131.115 256.997,131.115 256.694,131.418
NetC24_2: C24.2 CN14.2 U2.7 | length 17.2
  Top Layer w0.254: U2.7@286.41,146.318 299.274,146.318 C24.2@299.517,146.075 299.521,146.079 CN14.2@303.538,146.079
NetC25_2: C25.2 CN15.2 U2.8 | length 38.7
  Top Layer w0.254: U2.8@286.41,146.968 290.757,146.968 293.878,150.089 293.878,169.215 296.015,171.352 CN15.2@303.817,171.352
NetC26_1: C26.1 C68.1 L4.2 U31.13 | length 14.7
  Top Layer w0.254: U31.13@250.781,131.605 253.855,131.605 254.813,132.563 C68.1@254.813,134.01
  Top Layer w0.38: C68.1@254.813,134.01 256.184,134.01 ; C68.1@255.032,133.791 cw(c255.561,133.262) 255.561,134.01 cw(c255.561,134.759) C68.1@255.032,134.23 ; C26.1@256.425,134.247 cw(c256.184,134.251) 256.184,134.01 ; C26.1@256.584,133.84 ccw(c256.184,133.458) 256.184,134.01 ; L4.2@256.709,137.291 cw(c256.015,136.597) 256.997,136.597 cw(c257.98,136.597) L4.2@257.285,137.291 ; L4.2@256.997,137.617 C26.1@256.997,134.823 256.184,134.01
NetC27_2: C27.2 CN18.2 U2.9 | length 44.6
  Top Layer w0.254: U2.9@286.41,147.618 290.467,147.618 293.319,150.47 293.319,172.836 302.199,181.715 CN18.2@303.817,181.715
NetC28_1: C28.1 U30.7 | length 5.9
  Top Layer w0.38: U30.7@135.592,162.272 136.661,162.272 ; U30.7@136.24,162.015 cw(c136.661,161.799) 136.661,162.272 ; U30.7@136.24,162.529 ccw(c136.661,162.745) 136.661,162.272 ; C28.1@138.509,160.698 ccw(c138.024,160.246) 138.024,160.909 ; C28.1@138.509,161.12 cw(c138.024,161.572) 138.024,160.909 ; C28.1@138.786,160.909 138.024,160.909 ; 136.661,162.272 138.024,160.909
NetC29_2: C29.2 CN19.2 R29.1 U7.61 | length 97.1
  Top Layer w0.254: U7.61@213.928,142.855 v2(213.928,147.955) ; v2(253.797,147.955) 262.788,147.955 267.36,152.527 267.36,171.501 264.013,174.848 CN19.2@264.013,184.963 ; v2@253.884,147.868 cw(c254.094,147.658) 254.094,147.955 cw(c254.094,148.252) v2@253.884,148.042 ; R29.1@263.769,178.984 cw(c263.181,178.396) 264.013,178.396 ; 264.013,178.299 cw(c264.982,178.299) R29.1@264.297,178.984
  Bottom Layer w0.254: v2(213.928,147.955) v2(253.797,147.955) ; v2@214.015,147.868 cw(c214.225,147.658) 214.225,147.955 cw(c214.225,148.252) v2@214.015,148.042 ; v2@253.71,147.868 ccw(c253.5,147.658) 253.5,147.955 ccw(c253.5,148.252) v2@253.71,148.042
NetC30_2: C30.2 CN20.2 R30.1 U7.60 | length 95.2
  Top Layer w0.254: v4(214.427,147.269) U7.60@214.428,142.855 ; v3(252.959,147.269) 262.915,147.269 271.785,156.139 CN20.2@271.785,184.963 ; v3@253.046,147.182 cw(c253.256,146.972) 253.256,147.269 cw(c253.256,147.566) v3@253.046,147.356
  Bottom Layer w0.254: v4(214.427,147.269) v3(252.959,147.269) ; v3@252.872,147.182 ccw(c252.662,146.972) 252.662,147.269 ccw(c252.662,147.566) v3@252.872,147.356
NetC31_2: C31.2 CN21.2 R31.1 U7.55 | length 96.1
  Top Layer w0.254: v4(216.916,146.583) U7.55@216.928,142.855 ; v3(252.12,146.583) 263.195,146.583 279.634,163.023 CN21.2@279.634,184.963 ; v3@252.207,146.496 cw(c252.417,146.286) 252.417,146.583 cw(c252.417,146.88) v3@252.207,146.67
  Bottom Layer w0.254: v4(216.916,146.583) v3(252.12,146.583) ; v3@252.033,146.496 ccw(c251.823,146.286) 251.823,146.583 ccw(c251.823,146.88) v3@252.033,146.67
NetC32_2: C32.2 CN22.2 R32.1 U7.54 | length 99
  Top Layer w0.254: U7.54@217.428,142.855 v4@217.428,145.898 ; v3(252.781,145.898) 263.474,145.898 287.483,169.906 CN22.2@287.483,184.963 ; v3@252.868,145.811 cw(c253.078,145.601) 253.078,145.898 cw(c253.078,146.195) v3@252.868,145.985
  Bottom Layer w0.254: v4(217.424,145.898) v3(252.781,145.898) ; v3@252.694,145.811 ccw(c252.484,145.601) 252.484,145.898 ccw(c252.484,146.195) v3@252.694,145.985
NetC33_2: C33.2 CN23.2 R33.1 U7.52 | length 102
  Top Layer w0.254: U7.52@218.428,142.855 218.428,144.667 218.973,145.212 v3(221.158,145.212) ; v3@221.071,145.125 ccw(c220.861,144.915) 220.861,145.212 ccw(c220.861,145.509) v3@221.071,145.299 ; v3(253.492,145.212) 263.677,145.212 295.306,176.84 CN23.2@295.306,184.963 ; v3@253.579,145.125 cw(c253.789,144.915) 253.789,145.212 cw(c253.789,145.509) v3@253.579,145.299
  Bottom Layer w0.254: v3(221.158,145.212) v3(253.492,145.212) ; v3@221.245,145.125 cw(c221.455,144.915) 221.455,145.212 cw(c221.455,145.509) v3@221.245,145.299 ; v3@253.405,145.125 ccw(c253.195,144.915) 253.195,145.212 ccw(c253.195,145.509) v3@253.405,145.299
NetC34_2: C34.2 C35.1 D4.2 F1.2 U6.1 | length 19.5
  Top Layer w1.5: F1.2@125.044,88.951 125.044,92.583 125.262,92.365 C35.1@132.74,92.365 U6.1@132.74,100.457
NetC47_1: C47.1 R65.2 U7.12 Y1.3 | length 12.8
  Top Layer w0.254: C47.1@209.22,119.177 209.222,119.179 Y1.3@211.141,119.179 212.117,119.179 ; Y1.3@211.576,118.889 cw(c212.117,118.529) 212.117,119.179 ; Y1.3@211.576,119.468 ccw(c212.117,119.828) 212.117,119.179 ; U7.12@212.428,127.655 212.428,119.49 212.117,119.179
NetC48_1: C48.1 R65.1 U7.13 Y1.1 | length 14
  Top Layer w0.254: U7.13@212.928,127.655 212.928,124.612 213.741,123.8 Y1.1@213.741,120.879 C48.1@215.773,120.879 ; Y1.1@213.371,121.248 ccw(c212.478,122.141) 213.741,122.141 ccw(c215.004,122.141) Y1.1@214.111,121.248 ; R65.1@213.477,122.52 cw(c212.84,121.883) 213.741,121.883 cw(c214.641,121.883) R65.1@214.005,122.52 ; R65.1@213.477,123.047 ccw(c212.841,123.684) 213.741,123.684 ccw(c214.641,123.684) R65.1@214.005,123.047
NetC49_1: C49.1 R77.2 S1.2 U7.14 | length 18.9
  Top Layer w0.254: U7.14@213.428,127.655 213.428,125.078 v2(216.433,122.072) 217.475,121.031 C49.1@217.475,120.879 217.477,120.877 R77.2@219.202,120.877 ; v2@216.31,122.072 ccw(c216.013,122.072) 216.223,122.282 ccw(c216.433,122.492) v2@216.433,122.195 ; v2@216.433,121.949 cw(c216.433,121.652) 216.643,121.862 cw(c216.853,122.072) v2@216.556,122.072 ; v2@216.804,117.693 cw(c216.594,117.483) 216.891,117.483 cw(c217.188,117.483) v2@216.978,117.693 ; v2(216.891,117.78) 216.891,116.129 S1.2@217.043,115.977
  Bottom Layer w0.254: v2@216.433,121.949 cw(c216.433,121.652) 216.643,121.862 cw(c216.853,122.072) v2@216.556,122.072 ; v2(216.433,122.072) 216.891,121.615 v2(216.891,117.78) ; v2@216.804,117.867 ccw(c216.594,118.077) 216.891,118.077 ccw(c217.188,118.077) v2@216.978,117.867
NetC56_1: C56.1 C59.1 R79.1 U7.21 | length 15
  Top Layer w0.254: U7.21@216.928,127.655 216.928,125.007 217.957,123.977 220.574,123.977 220.929,123.622 C59.1@220.929,120.853
  Top Layer w0.38: C59.1@220.929,120.853 224.358,120.853 R79.1@224.638,121.133 ; C59.1@221.148,120.634 cw(c221.678,120.105) 221.678,120.853 cw(c221.678,121.602) C59.1@221.148,121.072
NetC60_2: C60.2 U7.49 | length 6.8
  Top Layer w0.3: U7.49@220.528,140.755 222.848,140.755 223.418,141.326 C60.2@225.73,141.326 ; C60.2@225.432,141.078 ccw(c224.835,140.481) 224.835,141.326 ccw(c224.835,142.171) C60.2@225.432,141.573
NetC61_2: C61.2 U7.73 | length 4.3
  Top Layer w0.254: C61.2@207.061,146.787 207.928,145.919 U7.73@207.928,142.855
NetC65_1: C65.1 R98.2 U31.6 Y2.3 | length 14.7
  Top Layer w0.254: U31.6@250.781,128.105 Y2.3@256.767,128.105 ; 253.953,128.105 cw(c253.953,127.154) R98.2@254.625,127.827 ; 254.024,128.105 ccw(c254.024,128.955) R98.2@254.625,128.354 ; R98.2@255.153,127.827 cw(c255.825,127.154) 255.825,128.105 ; R98.2@255.153,128.354 ccw(c255.754,128.955) 255.754,128.105 ; 255.499,128.105 cw(c255.499,126.83) Y2.3@256.401,127.732 ; 255.517,128.105 ccw(c255.517,129.355) Y2.3@256.401,128.471 ; 256.112,128.105 cw(c256.112,127.443) Y2.3@256.58,127.911
  Top Layer w0.3: C65.1@256.445,129.826 cw(c255.847,129.228) 256.692,129.228 cw(c257.537,129.228) C65.1@256.94,129.826 ; C65.1@256.692,130.073 256.692,128.179 256.767,128.105 Y2.3@256.77,128.101
NetC69_1: C69.1 R11.1 U25.5 | length 11.1
  Top Layer w0.38: U25.5@135.592,122.267 139.099,122.267 C69.1@139.446,121.92 R11.1@142.113,121.92 ; 136.639,122.267 cw(c136.639,119.701) C69.1@138.454,121.516 ; 137.557,122.267 cw(c137.557,120.619) C69.1@138.722,121.784 ; R11.1@141.894,121.701 ccw(c141.365,121.172) 141.365,121.92 ccw(c141.365,122.668) R11.1@141.894,122.139
NetC70_1: C70.1 U25.7 | length 3.4
  Top Layer w0.38: U25.7@135.592,124.807 138.058,124.807 C70.1@138.735,124.13
NetC73_1: C73.1 R86.1 U30.5 | length 10
  Top Layer w0.38: U30.5@135.592,159.732 136.864,159.732 137.846,158.75 ; C73.1@138.589,158.393 ccw(c137.846,157.798) 137.846,158.75 ; C73.1@138.589,159.107 cw(c137.846,159.702) 137.846,158.75 ; R86.1@142.097,158.531 ccw(c141.568,158.002) 141.568,158.75 ccw(c141.568,159.498) R86.1@142.097,158.969 ; R86.1@142.316,158.75 C73.1@139.624,158.75 137.846,158.75
NetCN10_1: CN10.1 U25.16 | length 18.3
  Bottom Layer w1.5: CN10.1@116.086,134.304 128.742,134.304 130.674,136.237 U25.16@133.592,136.237
NetCN10_2: CN10.2 U25.13 | length 19.8
  Bottom Layer w0.6: CN10.2@116.086,131.804 116.709,132.427 U25.13@135.592,132.427
NetCN10_3: CN10.3 U25.12 | length 18.3
  Bottom Layer w1.2: CN10.3@116.086,129.304 118.382,129.304 120.235,131.157 U25.12@133.592,131.157
NetCN10_4: CN10.4 U25.9 | length 19.7
  Bottom Layer w0.6: CN10.4@116.086,126.804 116.629,127.347 U25.9@135.592,127.347
NetCN11_4: CN11.4 U7.70 | length 61.3
  Top Layer w0.254: CN11.4@161.689,165.971 164.178,165.971 167.97,162.179 177.292,162.179 186.868,152.603 206.553,152.603 209.428,149.728 U7.70@209.428,142.855
NetCN11_13: CN11.13 U7.88 | length 51.1
  Top Layer w0.254: CN11.13@161.689,143.471 163.386,143.471 171.602,135.255 U7.88@205.328,135.255 ; CN11.13@162.089,143.179 cw(c162.783,142.501) 162.783,143.471 cw(c162.783,144.442) CN11.13@162.089,143.764 ; CN11.13@162.27,143.001 cw(c163.386,141.912) 163.386,143.471 cw(c163.386,145.03) CN11.13@162.27,143.941
NetCN11_14: CN11.14 U7.89 | length 50.4
  Top Layer w0.254: CN11.14@161.689,140.971 163.676,140.971 169.893,134.755 U7.89@205.328,134.755 ; CN11.14@162.085,140.675 cw(c162.8,139.96) 162.8,140.971 cw(c162.8,141.983) CN11.14@162.085,141.267 ; CN11.14@162.265,140.495 cw(c163.414,139.346) 163.414,140.971 cw(c163.414,142.596) CN11.14@162.265,141.447
NetCN11_15: CN11.15 U7.90 | length 50.3
  Top Layer w0.254: CN11.15@161.689,138.471 163.89,138.471 168.107,134.255 U7.90@205.328,134.255 ; CN11.15@162.056,138.104 cw(c162.942,137.218) 162.942,138.471 cw(c162.942,139.724) CN11.15@162.056,138.838 ; CN11.15@162.235,137.925 cw(c163.555,136.605) 163.555,138.471 cw(c163.555,140.337) CN11.15@162.235,139.018
NetCN11_16: CN11.16 U7.91 | length 48.7
  Top Layer w0.254: CN11.16@161.689,135.971 164.638,135.971 166.854,133.755 U7.91@205.328,133.755 ; CN11.16@162.085,135.675 cw(c162.8,134.96) 162.8,135.971 cw(c162.8,136.983) CN11.16@162.085,136.267 ; CN11.16@162.265,135.495 cw(c163.414,134.346) 163.414,135.971 cw(c163.414,137.596) CN11.16@162.265,136.447
NetCN11_19: CN11.19 Q1.3 | length 6.1
  Top Layer w0.6: CN11.19@161.689,128.471 161.691,128.473 Q1.3@167.742,128.473
NetCN13_1: CN13.1 R15.1 U7.67 | length 74.2
  Top Layer w0.254: CN13.1@168.87,184.844 177.216,176.498 177.216,169.316 ; R15.1@175.311,169.316 177.216,169.316 ; U7.67@210.928,142.855 210.928,151.327 207.975,154.28 186.03,154.28 177.216,163.093 177.216,169.316